# Altium PCB PCB1.PcbDoc
Units mm, origin at the board's own origin, x right, y up, seen from the top; angles counter-clockwise.
Board outline 48.13 x 24.13 mm, 2 copper layers (Top Layer, Bottom Layer); 24 components, 14 nets, 60 pads, 7 vias.
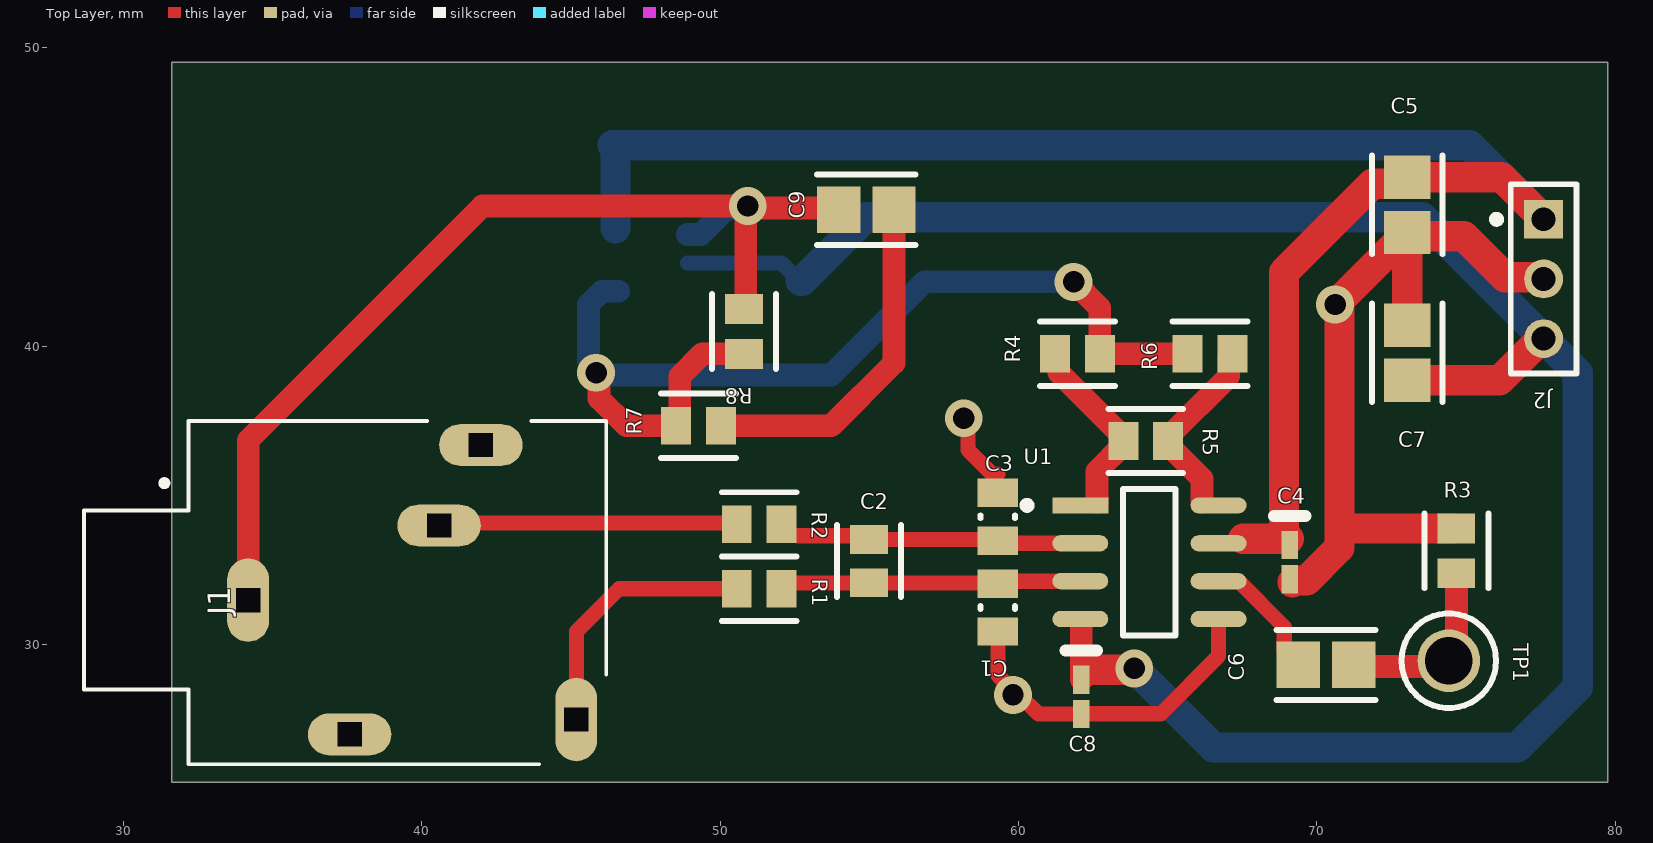
[diagram p0: Top Layer view]
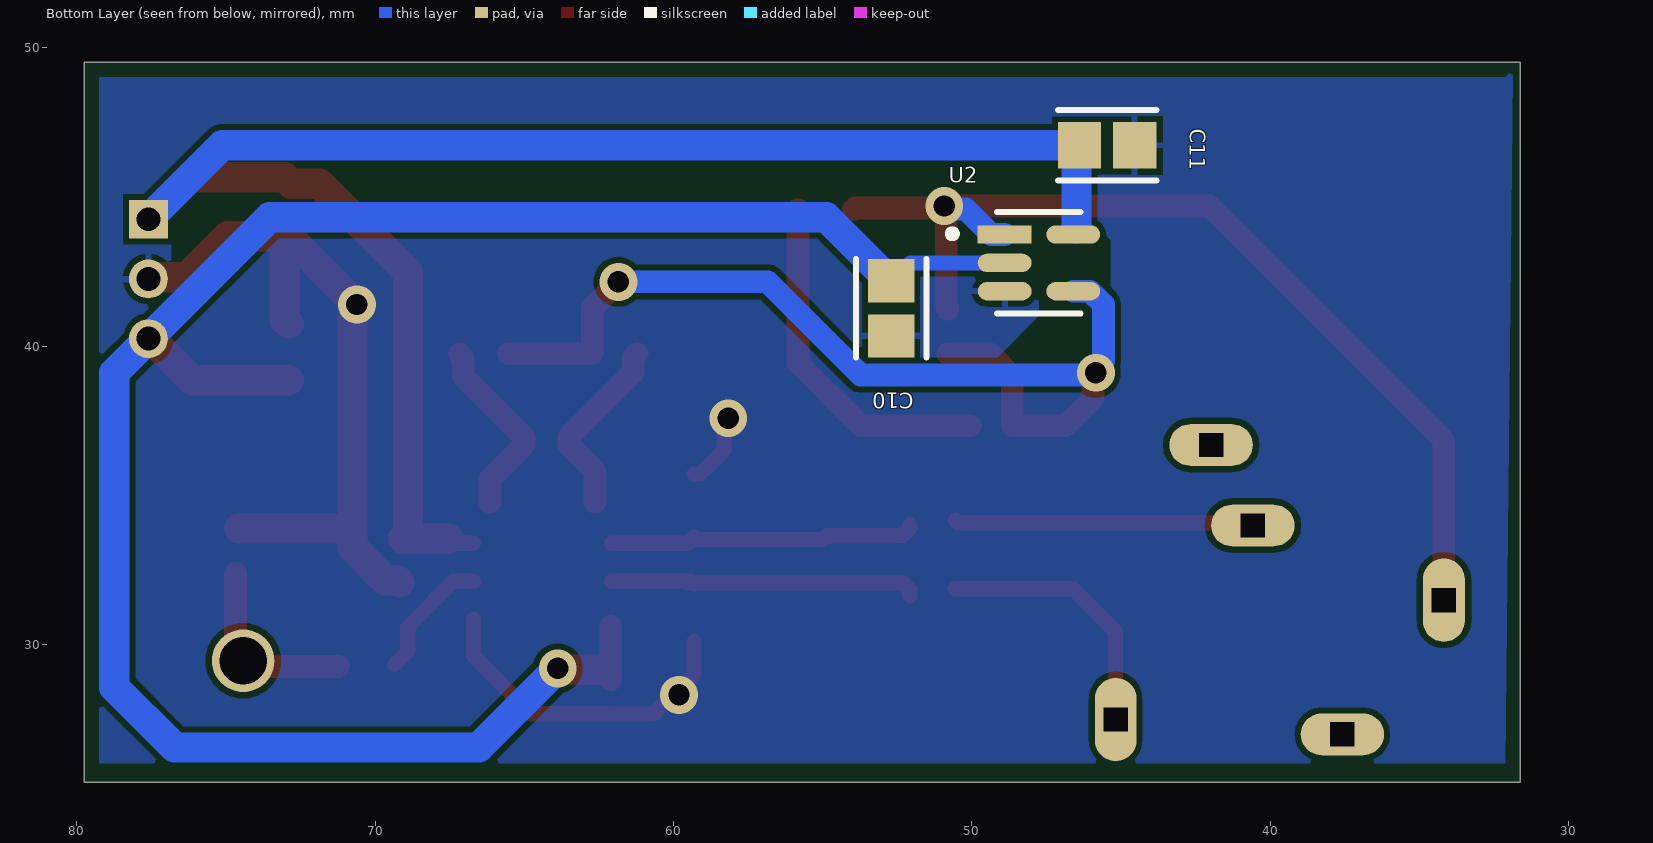
[diagram p1: Bottom Layer view, seen from below]
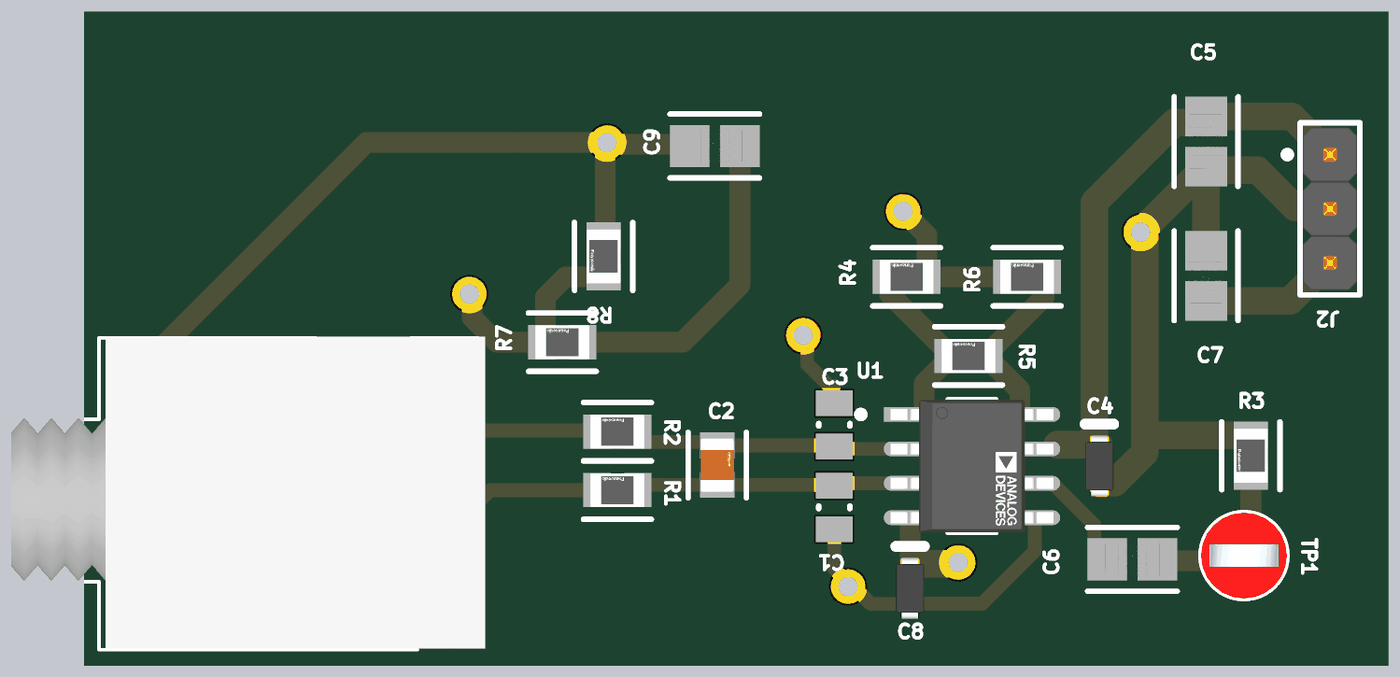
[diagram p2: 3D render of the assembled board from above, using the file's embedded part models]
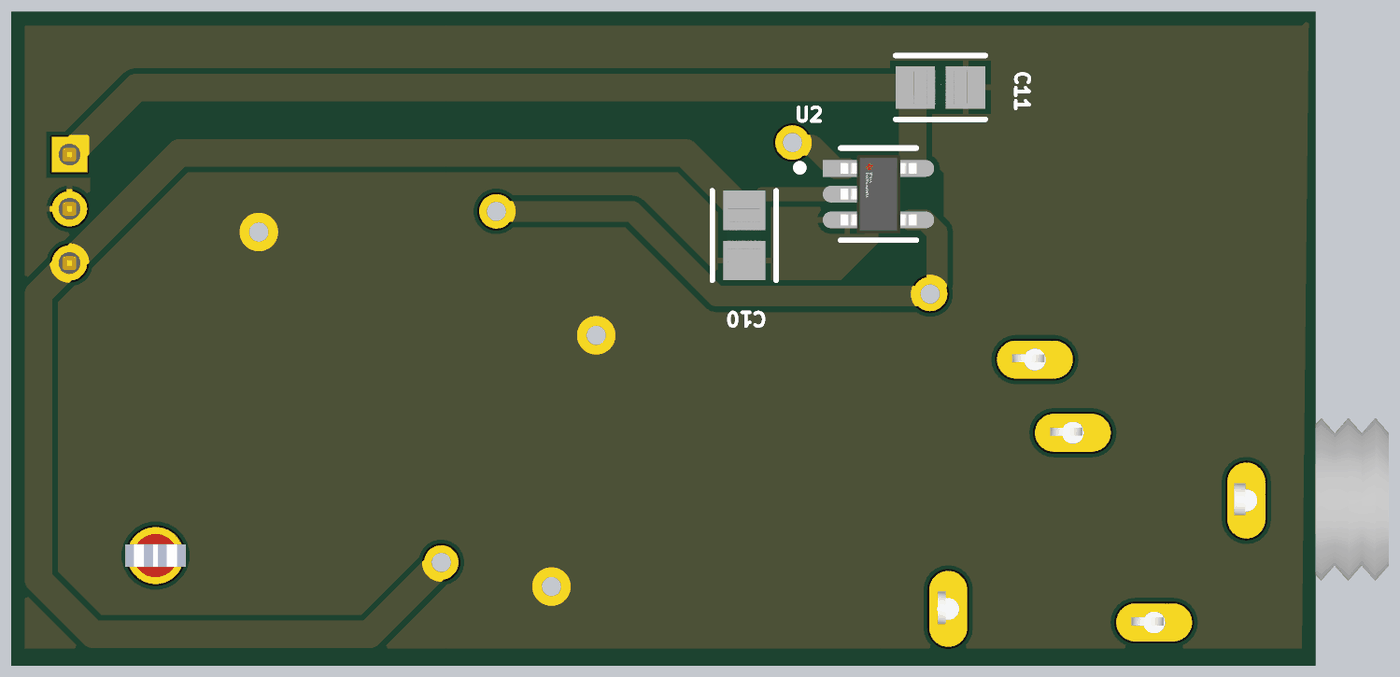
[diagram p3: 3D render of the assembled board from below, using the file's embedded part models]

## Layer stack, top to bottom
Top Solder: solder mask 0.0102, Solder Resist, Dk 3.5
Top Layer: signal copper 0.0356
Dielectric 1: dielectric 0.32, FR-4, Dk 4.8
Bottom Layer: signal copper 0.0356
Bottom Solder: solder mask 0.0102, Solder Resist, Dk 3.5

## Board outline
31.623,25.4 79.756,25.4 79.756,49.53 31.623,49.53

## Design rules (kind name [scope] priority, off if disabled: settings)
BoardOutlineClearance [All] p1: gap=0.2 ignorepadtopadclearanceinfootprint=FALSE
Clearance [All] p1: gap=0.203 ignorepadtopadclearanceinfootprint=FALSE except(0.25: Arc-Hole Track-Hole SMDPad-Hole THPad-Hole Via-Hole Fill-Hole Poly-Hole Region-Hole Text-Hole)
ComponentClearance [All] p1: gap=0.127 collisioncheckmode=3 verticalgap=0.127 showdistances=TRUE
DiffPairsRouting [All] p1: maxlimit=0.381 minlimit=0.203 mostfreqgap=0.203 toplayer_minwidth=0.203 toplayer_maxwidth=25.4 toplayer_prefwidth=0.203 bottomlayer_minwidth=0.203 bottomlayer_maxwidth=25.4 bottomlayer_prefwidth=0.203 maxuncoupledlength=12.7
Height [All] p1: minheight=0 maxheight=1816.048 prefheight=12.7
HoleSize [All] p1: absolutevalues=TRUE maxlimit=6.3 minlimit=0.3 maxpercent=80.000 minpercent=20.000
HoleToHoleClearance [All] p1: gap=0.25 allowstackedmicrovias=FALSE
MinimumAnnularRing [All] p1: minimumring=0.076
MinimumSolderMaskSliver [All] p1: minsoldermaskwidth=0
PlaneClearance [All] p1: clearance=0.203
PlaneConnect PlaneConnectPowerPads [InPadClass('PowerPads')] p1: planeconnectstyle=Direct reliefexpansion=0.508 reliefentries=4 reliefconductorwidth=0.254 reliefairgap=0.254
PlaneConnect [All] p2: pad.planeconnectstyle=Relief pad.reliefexpansion=0.3 pad.reliefentries=4 pad.reliefconductorwidth=0.203 pad.reliefairgap=0.203 via.planeconnectstyle=Direct via.reliefexpansion=0.3 via.reliefentries=4 via.reliefconductorwidth=0.127 via.reliefairgap=0.127
PolygonConnect PolygonConnectPowerPads [All vs (InPadClass('PowerPads'))] p1: connectstyle=Direct reliefconductorwidth=0.254 reliefentries=4 polygonreliefangle="90 Angle" airgapwidth=0.254
PolygonConnect [All] p2: thpad.connectstyle=Relief thpad.reliefconductorwidth=0.203 thpad.reliefentries=4 thpad.polygonreliefangle="90 Angle" thpad.airgapwidth=0.203 smdpad.connectstyle=Relief smdpad.reliefconductorwidth=0.203 smdpad.reliefentries=4 smdpad.polygonreliefangle="90 Angle" smdpad.airgapwidth=0.203 via.connectstyle=Direct via.reliefconductorwidth=0.127 via.reliefentries=4 via.polygonreliefangle="90 Angle" via.airgapwidth=0.127
RoutingVias [All] p1: holewidth=0.3 width=0.6 viastyle="Through Hole" minholewidth=0.3 minwidth=0.6 maxholewidth=0.6 maxwidth=6.6
SilkToSilkClearance [All] p1: silktosilkclearance=0
SilkToSolderMaskClearance [IsPad] p1: minsilkscreentomaskgap=0.127 clearancetoexposedcopper=TRUE
SolderMaskExpansion [All] p1: expansion=0.075 istentingtop=FALSE
Width [All] p1: maxlimit=25.4 minlimit=0.203 preferedwidth=0.203 minimp=50.000000 maximp=50.000000 favimp=50.000000
20 further rules are at their usual default settings.

## Components (designator, comment, footprint, x,y, rotation, side; value= is the part's Value field where it differs from the comment)
C1 "1nF" CAPC0805(2012)145_L 59.309,31.242 r270 top
C2 "47nF" FP-GRM21B-0_1-IPC_C 54.991,32.801 r90 top
C3 "1nF" CAPC0805(2012)145_L 59.309,34.29 r270 top
C4 "0.1uF" VISH-TR8-M_L 69.088,32.766 r270 top
C5 "0.1uF" FP-CL21-IPC_A 73.025,44.741 r270 top
C6 "0.1uF" FP-CL21-IPC_A 70.305,29.324 r0 top
C7 "0.1uF" FP-CL21-IPC_A 73.025,39.788 r90 top
C8 "0.1uF" VISH-TR8-M_L 62.103,28.254 r270 top
C9 "0.1uF" FP-CL21-IPC_A 54.901,44.577 r0 top
C10 "0.1uF" FP-CL21-IPC_A 52.705,41.275 r270 bottom
C11 "0.1uF" FP-CL21-IPC_A 45.466,46.736 r180 bottom
J1 "3.5mm header" SWITCHCRAFT_35RAPC4BH3 37.432,31.746 r0 top
J2 "M22-2510305" FP-M22-2510305-MFG 77.597,42.259 r270 top
R1 "4k" FP-ERA6A-IPC_C 51.308,31.877 r180 top
R2 "4k" FP-ERA6A-IPC_C 51.308,34.036 r180 top
R3 "ERA6AEB102V" FP-ERA6A-IPC_C 74.676,33.147 r270 top
R4 "10k" FP-ERA6A-IPC_C 61.976,39.751 r180 top
R5 "100" FP-ERA6A-IPC_C 64.262,36.83 r180 top
R6 "10k" FP-ERA6A-IPC_C 66.421,39.751 r180 top
R7 "ERA6AEB102V" FP-ERA6A-IPC_C 49.276,37.338 r180 top
R8 "ERA6AEB102V" FP-ERA6A-IPC_C 50.8,40.502 r270 top
TP1 "5010" KSTN-5010_V 74.422,29.464 r0 top
U1 "AD620BRZ-R7" FP-R-8-IPC_C 64.389,32.766 r0 top
U2 "TLV9151IDBVR" FP-DBV0005A-IPC_A 47.752,42.799 r180 bottom

## Footprints (in the part's own frame and the unit in brackets; to place one, negate y for a bottom-side part, rotate by r counter-clockwise, add the part's x,y. Pads: shape width x height; smd on the part's side, far side on the other; paste and mask are expansions set on the pad)
CAPC0805(2012)145_L [mm] "Chip Capacitor, Body 2.0x1.2mm, Height 1.45mm, IPC High Density"
  rect 0.95x1.35 smd: 1(-0.8,0) 2(0.8,0)
  silkscreen extent -0.05,-0.58 0.05,0.58, body extent -1.1,-0.72 1.1,0.72, height 1.45
FP-CL21-IPC_A [mm]
  rect 1.455x1.556 smd paste+0 mask+0: 1(-0.926,0) 2(0.926,0)
  silkscreen extent -1.65,-1.18 1.65,1.18, body extent -2.15,-1.28 2.15,1.28, height 0.25
FP-DBV0005A-IPC_A [mm]
  rect 1.805x0.612 smd paste+0 mask+0: 1(-1.15,0.95)
  rrect100% 1.805x0.612 smd paste+0 mask+0: 2(-1.15,0) 3(-1.15,-0.95) 4(1.15,-0.95) 5(1.15,0.95)
  silkscreen extent -3.03,-1.7 1.4,1.7, body extent -1.4,-1.45 1.4,1.45, height 1.45
FP-ERA6A-IPC_C [mm]
  rect 1.005x1.262 smd paste+0 mask+0: 1(-0.751,0) 2(0.751,0)
  silkscreen extent -1.25,-1.07 1.25,1.07, body extent -1.35,-0.77 1.35,0.77, height 0.25
FP-GRM21B-0_1-IPC_C [mm]
  rect 0.958x1.262 smd paste+0 mask+0: 1(-0.727,0) 2(0.727,0)
  silkscreen extent -1.21,-1.07 1.21,1.07, body extent -1.31,-0.77 1.31,0.77, height 0.25
FP-M22-2510305-MFG [mm]
  rect 1.3x1.3 hole 0.8: 1(-2,0)
  round 1.3 hole 0.8: 2(0,0) 3(2,0)
  silkscreen extent -3.18,-1.7 3.18,1.1, body extent -3.27,-1.2 3.27,1.2, height 0.25
FP-R-8-IPC_C [mm]
  rect 1.874x0.542 smd paste+0 mask+0: 1(-2.316,1.905)
  rrect100% 1.874x0.542 smd paste+0 mask+0: 2(-2.316,0.635) 3(-2.316,-0.635) 4(-2.316,-1.905) 5(2.316,-1.905) 6(2.316,-0.635) 7(2.316,0.635) 8(2.316,1.905)
  silkscreen extent -4.23,-2.45 0.88,2.45, body extent -3.35,-2.55 3.35,2.55, height 0.25
KSTN-5010_V [mm] "Test Point, Dia 3.17mm"
  round 2.1 hole 1.6: 1(0,0)
  silkscreen extent -1.59,-1.58 1.59,1.58, body extent -1.59,-1.59 1.59,1.59, height 8.13
SWITCHCRAFT_35RAPC4BH3 [mm]
  oval 1.4x2.8 hole 0.8 square: 1(-3.25,-0.25) 4(7.75,-4.25)
  oval 2.8x1.4 hole 0.8 square: 2(4.55,4.95) 3(3.15,2.25) 5(0.15,-4.75)
  silkscreen extent -8.75,-5.75 8.75,5.75, body extent -8.51,-5.71 8.99,5.79, height 6.5
VISH-TR8-M_L [mm] "Molded Capacitor, 2-Leads, Body 1.8x1.05mm, IPC High Density"
  rect 0.95x0.55 smd: 1(-0.575,0) 2(0.575,0)
  silkscreen extent -1.55,-0.53 -1.55,0.53, body extent -1.12,-0.53 1.12,0.53, height 0.9

## Part data
C1 C3: library part CMP-1036-02976-1, "CAP 1nF 50V ±5% 0805 (2012 Metric) Thickness 1.45mm SMD", Case-EIA=0805, Case-Metric=2012, Rated Voltage="50 V", Tolerance=Â±5%, Max Thickness="1.45 mm", Technology=SMT
C2: library part CMP-06035-029151-1, "Chip Multilayer Ceramic Capacitors for General Purpose, 0805, 47000pF, SL, +350/-1000ppm/°C, 5%, 50V,   GRM21B1X1H473JA01L", Case Code (Imperial)=0805, Case Code (Metric)=2012, Max Operating Temperature=125°C, Min Operating Temperature=-55°C, Tolerance=5%, Voltage Rating=50V, Capacitance=47nF, Case/Package=0805, Lead Free="Lead Free", Length=0.079inch, Mount="Surface Mount", Packaging="Tape and Reel", Termination=SMD/SMT, Thickness=0.053inch, Voltage Rating (DC)=50V, Width=0.049inch
C4: library part CMP-2000-07316-1, "Tantalum Capacitor, 10 uF, +/- 20%, 10 V, -55 to 125 degC, 2-Pin SMD (M), RoHS, Tape and Reel, TR8M106M010C2000", Capacitance=10µF, ESR (Equivalent Series Resistance)=2Ohm, Lifetime @ Temp.=-, Manufacturer=Vishay, Manufacturer Size Code=M, Operating Temperature=-55°C~125°C, Package / Case=0603(1608Metric), Package Description="2-Pin Surface Mount Device, Body 1.6 x 0.85 mm", Package Reference=TR8-M, Standard Package=1, Tolerance=±20%, Voltage - Rated=10V, Catalog Drawings=TR8SeriesTR8SeriesBottom, Category=Capacitors, Datasheet URL=http://www.vishay.com/docs/40114/tr8.pdf, Datasheet Version=03/2016, Family=TantalumCapacitors, Featured Product=TR8SeriesMoldedMicroTan™TantalumChipCapacitors, Features=GeneralPurpose, Height - Seated (Max)="0.035\"(0.89mm)", Lead Spacing=-, Manufacturer URL=http://www.vishay.com/, Mounting Technology=SurfaceMount, Mounting Type=SurfaceMount, Online Catalog=MICROTAN®TR8Series, Other Names=718-1673-6, Packaging=Digi-Reel®, Series=MICROTAN®TR8, Size / Dimension="0.063\"Lx0.033\"W(1.60mmx0.85mm)", Type=Molded
C5 C6 C7 C9 C10 C11: library part CMP-13271-004391-1, "CL21 Series 0805 100nF 25V ±20% Tolerance X7R Multilayer Ceramic Chip Capacitor, CL21B104MACNNNC", Capacitance=100nF, Case Code (Imperial)=0805, Case Code (Metric)=2012, Dielectric=X7R, Max Operating Temperature=125°C, Min Operating Temperature=-55°C, Package Quantity=1, Tolerance=20%, Voltage Rating=25V, Case/Package=0805, Construction=Flat, Depth=1.25mm, Height=0.85mm, Lead Free="Lead Free", Length=2mm, Mount="Surface Mount", Packaging="Tape and Reel", Radiation Hardening=No, RoHS Compliant=Yes, Series=CL, Thickness=0.037inch, Voltage Rating (DC)=25V, Width=0.049inch
C8: library part CMP-2000-07316-1, "Tantalum Capacitor, 10 uF, +/- 20%, 10 V, -55 to 125 degC, 2-Pin SMD (M), RoHS, Tape and Reel,   TR8M106M010C2000", Capacitance=10µF, ESR (Equivalent Series Resistance)=2Ohm, Lifetime @ Temp.=-, Manufacturer=Vishay, Manufacturer Size Code=M, Operating Temperature=-55°C~125°C, Package / Case=0603(1608Metric), Package Description="2-Pin Surface Mount Device, Body 1.6 x 0.85 mm", Package Reference=TR8-M, Standard Package=1, Tolerance=±20%, Voltage - Rated=10V, Catalog Drawings=TR8SeriesTR8SeriesBottom, Category=Capacitors, Datasheet URL=http://www.vishay.com/docs/40114/tr8.pdf, Datasheet Version=03/2016, Family=TantalumCapacitors, Featured Product=TR8SeriesMoldedMicroTan™TantalumChipCapacitors, Features=GeneralPurpose, Height - Seated (Max)="0.035\"(0.89mm)", Lead Spacing=-, Manufacturer URL=http://www.vishay.com/, Mounting Technology=SurfaceMount, Mounting Type=SurfaceMount, Online Catalog=MICROTAN®TR8Series, Other Names=718-1673-6, Packaging=Digi-Reel®, Series=MICROTAN®TR8, Size / Dimension="0.063\"Lx0.033\"W(1.60mmx0.85mm)", Type=Molded
J1: library part 35RAPC4BH3, "3.50mm (0.141\", 1/8\", Mini Plug) - Headphone Phone Jack Stereo (3 Conductor, TRS) Connector Solder", Package=None, Availability=Unavailable, MP=35RAPC4BH3, Price=None
J2: library part CMP-00671-05385874-1, "M22-2510305 Conn Unshrouded Header M 3 POS 2mm Solder ST Top Entry Thru-Hole Bulk/Loose", Case/Package=SIL, Color=Black, Contact Resistance=20mΩ, Current Rating=2A, Max Current Rating=1A, Max Operating Temperature=105°C, Min Operating Temperature=-40°C, Voltage Rating=650V, Connector Type="Male Pin", Contact Material="Gold, Nickel", Contact Mating Length=3.5052mm, Contact Plating=Gold, Depth=2mm, Gender=Male, Height=5.45mm, Housing Color=Black, Housing Material=Nylon, Length=6mm, Mount="Through Hole", Number of Contacts=3, Number of Positions=3, Number of Rows=1, Orientation=Straight, Pitch=2mm, Radiation Hardening=No, REACH SVHC="No SVHC", RoHS=Compliant, Termination=Solder
R1 R2 R5 R6: library part CMP-2001-00581-2, "RES 1K OHM 0.1% 1/8W 0805,  ERA6AEB102V", Case Code (Imperial)=0805, Case Code (Metric)=2012, Max Operating Temperature=155°C, Max Power Dissipation=125mW, Min Operating Temperature=-55°C, Package Quantity=5000, Resistance=1kR, Resistance Tolerance=0.1%, Resistor Type="Thin Film", Temperature Coefficient=25ppm/°C, Voltage Rating=100V, Case/Package=0805, Construction=Rectangular, Contact Plating=Tin, Depth=1.25mm, Height=0.5mm, Length=2mm, Military Standard=Not, Mount="Surface Mount", Number of Pins=2, Number of Terminations=2, Packaging="Tape and Reel", Power Rating=125mW, Radiation Hardening=No, REACH SVHC="No SVHC", RoHS Compliant=Yes, Series=ERA-6A, Technology="THIN FILM", Termination=SMD/SMT, Tolerance=0.1%, Width=1.25mm, Working Voltage=100V
R3 R7 R8: library part CMP-2001-00581-2, "RES 1K OHM 0.1% 1/8W 0805", Case Code (Imperial)=0805, Case Code (Metric)=2012, Max Operating Temperature=155°C, Max Power Dissipation=125mW, Min Operating Temperature=-55°C, Package Quantity=5000, Resistance=1kR, Resistance Tolerance=0.1%, Resistor Type="Thin Film", Temperature Coefficient=25ppm/°C, Voltage Rating=100V, Case/Package=0805, Construction=Rectangular, Contact Plating=Tin, Depth=1.25mm, Height=0.5mm, Length=2mm, Military Standard=Not, Mount="Surface Mount", Number of Pins=2, Number of Terminations=2, Packaging="Tape and Reel", Power Rating=125mW, Radiation Hardening=No, REACH SVHC="No SVHC", RoHS Compliant=Yes, Series=ERA-6A, Technology="THIN FILM", Termination=SMD/SMT, Tolerance=0.1%, Width=1.25mm, Working Voltage=100V
R4: library part CMP-2001-00581-2, "RES 1K OHM 0.1% 1/8W 0805,    ERA6AEB102V", Case Code (Imperial)=0805, Case Code (Metric)=2012, Max Operating Temperature=155°C, Max Power Dissipation=125mW, Min Operating Temperature=-55°C, Package Quantity=5000, Resistance=1kR, Resistance Tolerance=0.1%, Resistor Type="Thin Film", Temperature Coefficient=25ppm/°C, Voltage Rating=100V, Case/Package=0805, Construction=Rectangular, Contact Plating=Tin, Depth=1.25mm, Height=0.5mm, Length=2mm, Military Standard=Not, Mount="Surface Mount", Number of Pins=2, Number of Terminations=2, Packaging="Tape and Reel", Power Rating=125mW, Radiation Hardening=No, REACH SVHC="No SVHC", RoHS Compliant=Yes, Series=ERA-6A, Technology="THIN FILM", Termination=SMD/SMT, Tolerance=0.1%, Width=1.25mm, Working Voltage=100V
TP1: library part CMP-1672-00002-4, "Test Point, Red, Through Hole, RoHS, Bulk", Colour=Red, Manufacturer=Keystone, Package Quantity=100, ComponentLink1Description="Manufacturer URL", ComponentLink1URL=http://www.keyelco.com/, ComponentLink2Description=Datasheet, ComponentLink2URL=http://www.keyelco.com/product-pdf.cfm?p=1319, Contact Material=Bronze, Contact Plating=Silver, DatasheetVersion="Rev. F, 12/2013", Height="8.12 mm", Mount="Through Hole", Mounting Technology="Through Hole", PackageDescription="1-Pin Through Hole Device, Dia 3.17 mm", PackageReference=5010, Packaging=Bulk, Pins=1, REACH SVHC="No SVHC", RoHSCompliant=true
U1: library part CMP-09116-000394-1, "IC INST AMP 1 CIRCUIT 8SOIC", Case/Package=SOIC, Input Bias Current=1nA, Input Offset Voltage (Vos)=30mV, Input Resistance=10GR, Max Dual Supply Voltage=18V, Max Operating Temperature=125°C, Max Power Dissipation=650mW, Min Dual Supply Voltage=2.3V, Min Operating Temperature=-55°C, Min Supply Voltage=4.6V, Nominal Supply Current=1.3mA, Output Current per Channel=18mA, Package Quantity=1, -3db Bandwidth=1MHz, Amplifier Type="INSTRUMENTATION AMPLIFIER", Common Mode Rejection Ratio=93dB, Contact Plating=Tin, Lead Free="Contains Lead", Mount="Surface Mount", Number of Channels=1, Number of Circuits=1, Number of Elements=1, Number of Pins=8, Operating Supply Current=1.3mA, Operating Supply Voltage=18V, Packaging="Tape and Reel", Power Dissipation=650mW, Radiation Hardening=No, RoHS Compliant=Yes, Series=-, Slew Rate=1.2V/µs
U2: library part CMP-04895-000336-1, "OPAMP"

## Via types
v1: diameter 1.27, hole 0.711, Top Layer to Bottom Layer, 7 vias

## Nets (pads, with @x,y where several pads share a name; then routed paths per layer and width w, separated by ;. In a path a pad name is that pad's centre, name@x,y a point inside that pad or via, vN(x,y) a via of type N, cw(c..) or ccw(c..) an arc to the next point about the centre after c; other vN are vias at no path point)
+5: C4.1 C5.1 C11.1 J2.1 U1.7 U2.5 | length 57.1
  Top Layer w0.508: U1.7 67.38,33.401 U1.7@67.535,33.556 ; C4.1@69.067,33.556 69.088,33.535 C4.1
  Top Layer w1.016: U1.7@67.535,33.556 68.601,33.556 C4.1@69.067,33.556 ; C4.1@68.898,33.562 68.898,42.482 71.863,45.447 72.806,45.447 C5.1 ; C5.1@73.152,45.667 76.189,45.667 J2.1
  Bottom Layer w1.016: U2.5@46.497,43.951 46.497,46.631 C11.1 75.12,46.736 77.533,44.323 J2.1@77.597,44.323
-5: C7.1 C8.1 C10.1 J2.3 U1.4 U2.2 | length 69.3
  Top Layer w0.762: U1.4@62.103,30.624 62.103,29.161 C8.1 62.435,29.161
  Top Layer w1.016: 62.435,29.161 63.832,29.161 v1(63.881,29.21) ; C7.1@72.898,38.862 C7.1 76.123,38.862 77.52,40.259 J2.3
  Bottom Layer w0.508: U2.2 52.056,42.799 C10.1@52.578,42.277
  Bottom Layer w1.016: C10.1 52.756,42.201 54.878,44.323 73.533,44.323 J2.3 78.74,39.116 78.74,28.575 76.725,26.56 66.531,26.56 v1(63.881,29.21)
GND: C1.2 C3.1 C4.2 C5.2 C7.2 C8.2 C10.2 C11.2 J2.2 R3.1 U1.5 U2.3 | length 39.4
  Top Layer w0.508: v1(58.166,37.592) 58.312,37.446 58.312,36.522 59.109,35.725 59.309,35.725 ; C1.2@59.309,30.099 59.309,28.971 59.817,28.463 v1(59.817,28.321) 60.023,28.321 60.665,27.679 C8.2 ; C8.2@62.103,27.686 64.77,27.686 66.705,29.621 U1.5 ; C4.2 C4.2@69.088,32.259 ; v1(70.612,41.402) v1@70.758,41.256 ; 70.758,40.754 70.788,40.723
  Top Layer w1.016: C4.2@69.183,32.099 69.239,32.155 69.658,32.155 70.686,33.183 ; v1(70.612,41.402) 72.755,43.545 72.755,43.596 72.974,43.815 C5.2 ; 70.758,33.255 70.758,40.754 v1@70.758,41.256 ; 70.859,33.775 70.982,33.898 R3.1@74.553,33.898 ; C7.2@72.898,40.767 73.025,40.894 C5.2 ; J2.2 77.543,42.313 76.305,42.313 74.93,43.688 73.152,43.688 C5.2
In1: C1.1 C2.1 R1.1 U1.3 | length 10.5
  Top Layer w0.508: R1.1@52.07,31.64 52.07,31.837 52.307,32.074 C2.1 C1.1@59.506,32.074 ; C1.1 59.398,32.131 U1.3
In2: C2.2 C3.2 R2.1 U1.2 | length 10.4
  Top Layer w0.508: R2.1@52.07,34.023 52.07,33.896 52.307,33.659 52.601,33.659 52.605,33.655 54.864,33.655 C2.2 55.143,33.528 C3.2@59.309,33.528 ; C3.2@59.309,33.617 59.525,33.401 U1.2
LA: J1.3 R2.2 | length 10
  Top Layer w0.508: J1.3@40.64,34.163 40.724,34.079 50.474,34.079 R2.2@50.557,34.163
NetC6_1: C6.1 U1.6 | length 4.3
  Top Layer w0.508: U1.6 67.371,32.131 68.906,30.596 68.906,29.773 C6.1@69.342,29.337
NetC6_2: C6.2 R3.2 TP1.1 | length 6.3
  Top Layer w0.762: C6.2@71.231,29.273 74.231,29.273 74.676,29.718 R3.2
NetC9_2: C9.2 R7.1 | length 11.8
  Top Layer w0.762: R7.1@50.038,37.338 53.721,37.338 55.827,39.444 C9.2
NetR4_2: R4.2 R5.2 U1.1 | length 6.3
  Top Layer w0.762: R4.2@61.214,39.751 61.347,39.618 61.347,39.123 63.511,36.959 R5.2 63.511,36.701 62.629,35.819 U1.1@62.629,34.781
NetR5_1: R5.1 R6.1 U1.8 | length 6.3
  Top Layer w0.762: U1.8@66.149,34.781 66.149,35.565 65.013,36.701 R5.1 65.013,36.959 67.05,38.996 67.05,39.618 R6.1@67.183,39.751
RA: J1.4 R1.2 | length 8.9
  Top Layer w0.508: J1.4 45.182,30.45 46.609,31.877 R1.2
RLD: C9.1 J1.1 R8.1 U2.1 | length 34.4
  Top Layer w0.762: J1.1 34.182,36.849 42.037,44.704 v1(50.927,44.704) ; R8.1 50.863,41.316 50.863,44.64 v1(50.927,44.704) ; C9.1 53.911,44.64 50.99,44.64 v1(50.927,44.704)
  Bottom Layer w0.762: U2.1 49.349,43.749 50.207,44.607 50.83,44.607 v1(50.927,44.704)
RLi: R4.1 R6.2 R7.2 R8.2 U2.4 | length 34.5
  Top Layer w0.762: v1(45.847,39.116) 45.944,39.019 45.944,38.257 46.863,37.338 R7.2 ; R7.2@48.647,37.344 48.647,38.995 49.403,39.751 R8.2 ; v1(61.849,42.164) 62.727,41.286 R4.1 R6.2@65.532,39.751
  Bottom Layer w0.762: U2.4 46.039,41.849 45.593,41.403 45.593,39.507 45.847,39.253 v1(45.847,39.116) 45.925,39.038 53.725,39.038 56.851,42.164 v1(61.849,42.164)
pads on no net: J1.2 J1.5

## Polygon pours and split planes (outlines as drawn)
GND on Bottom Layer "GND_L02_P001" (solid, pour order 1): 31.877,49.276 32.131,49.022 79.248,49.022 79.248,26.035 32.131,26.035

## Other copper
Bottom Layer:
  pour cut-out: 47.752,42.037 47.752,41.021 49.276,39.497 46.355,39.497 45.466,40.386 46.482,41.402 47.371,41.402 47.625,41.656 47.625,42.164
  pour cut-out: 50.419,44.069 50.292,43.942 50.165,43.942 50.165,43.815 49.721,43.37 49.911,43.18 52.197,43.18 52.324,43.053 52.705,43.053 54.61,44.958 73.787,44.958 76.835,41.91 76.835,44.196 74.93,46.101 51.816,46.101 51.181,45.466 51.562,45.085 51.562,44.196 51.435,44.069
  pour cut-out: 45.72,42.164 45.847,42.164 45.974,42.291 47.371,42.291 47.752,41.91 48.133,42.291 48.006,42.418 48.006,43.307 47.752,43.561 47.498,43.561 47.244,43.307 45.72,43.307
  pour cut-out: 45.524,43.746 45.339,43.561 45.339,41.783 45.974,42.418 46.101,42.291 47.371,42.291 47.752,41.91 48.133,42.291 48.133,42.418 47.879,42.672 47.879,42.926 48.133,43.18 47.879,43.434 47.879,43.561 47.498,43.561 47.244,43.307 45.487,43.307
Multi-Layer:
  pour cut-out: 50.038,45.085 49.149,44.196 48.006,44.196 47.625,43.815 47.117,44.323 47.117,45.847 47.371,46.101 51.943,46.101 51.308,45.466 50.546,45.466 50.165,45.085